# Altium PCB HelicopterControllerPCB.PcbDoc
Units mil, origin at the board's own origin, x right, y up, seen from the top; angles counter-clockwise.
Board outline 2834.65 x 2440.95 mil, 2 copper layers (Top Layer, Bottom Layer); 28 components, 32 nets, 156 pads, 7 vias.
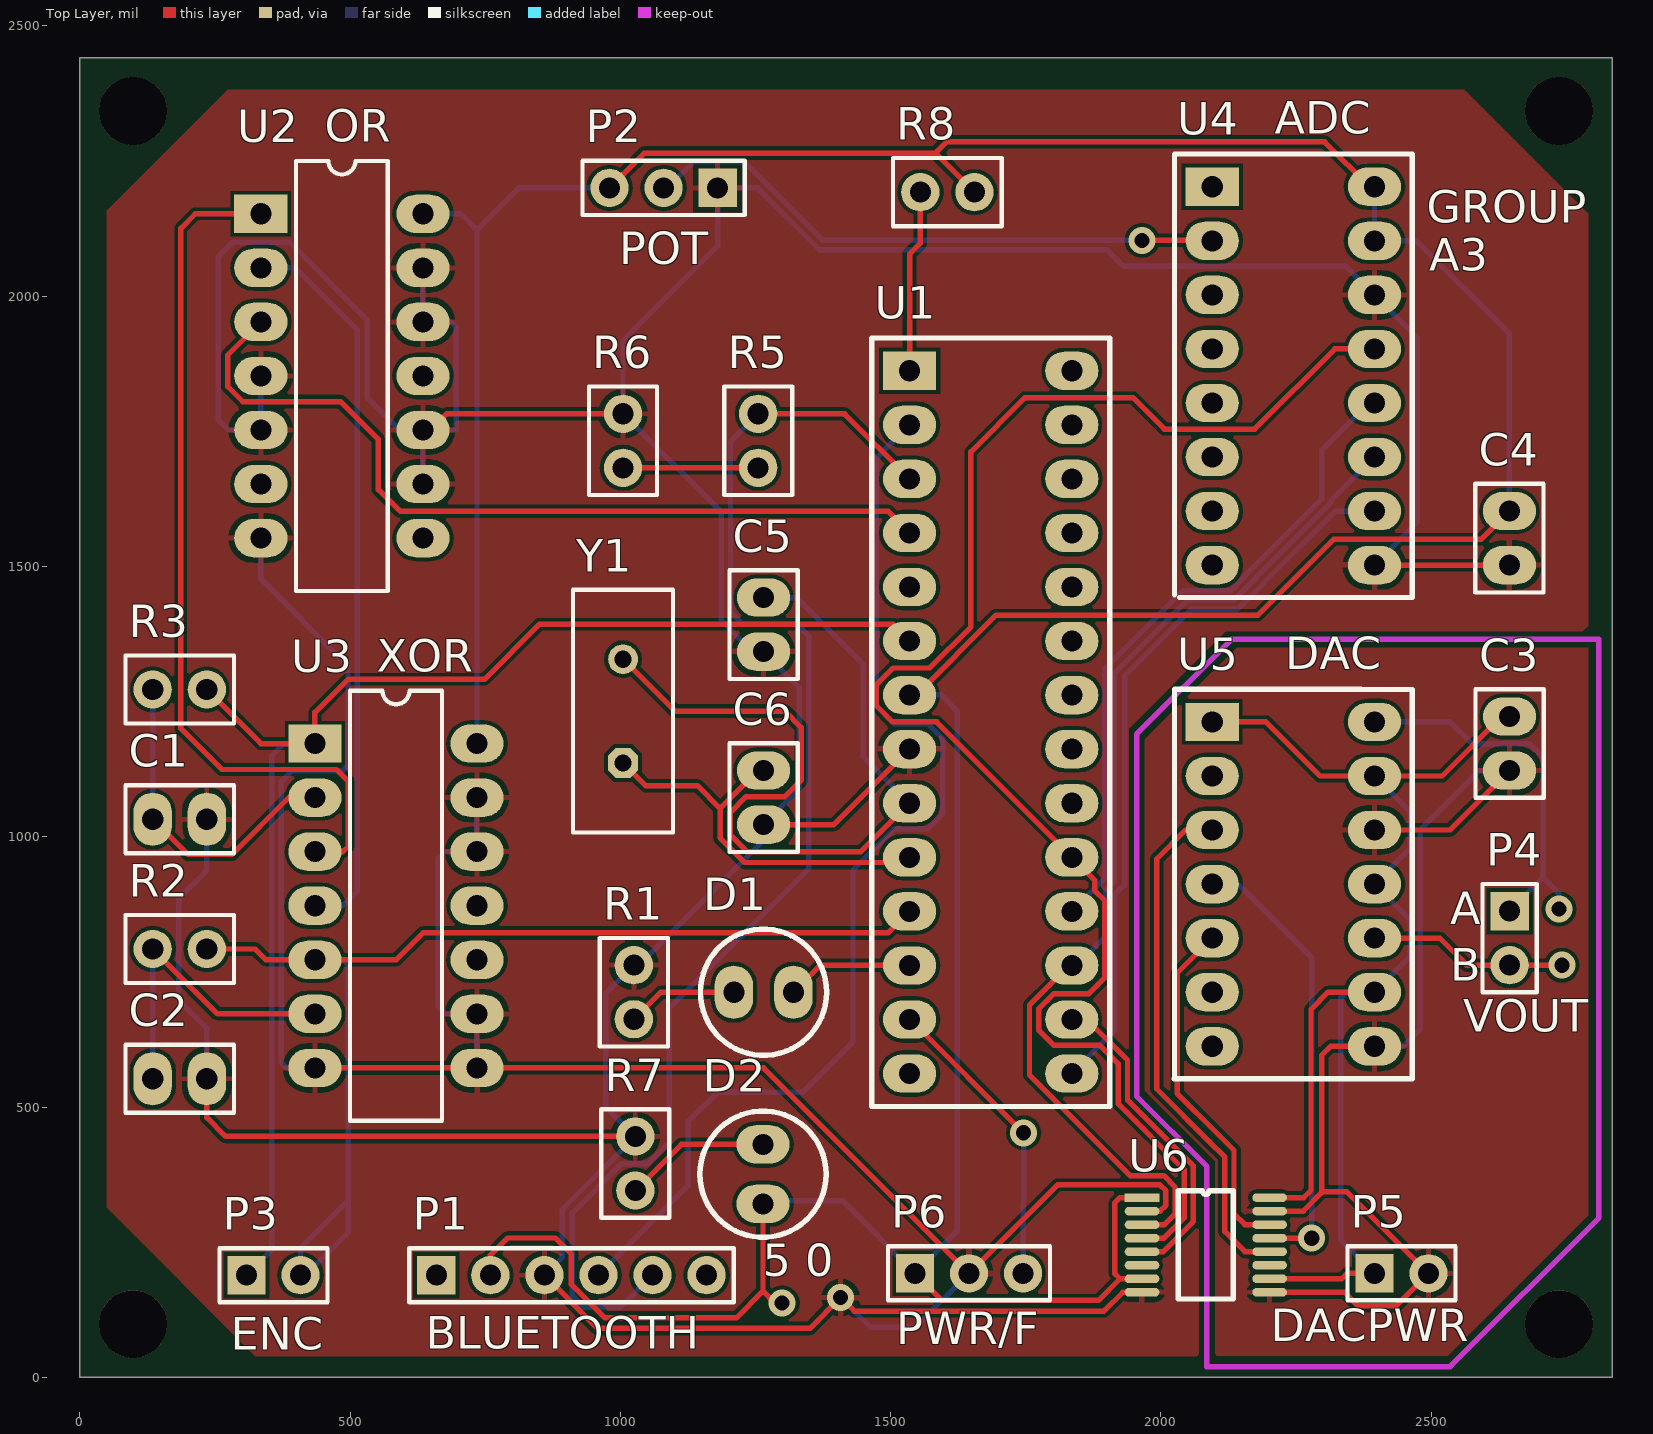
[diagram p0: Top Layer view]
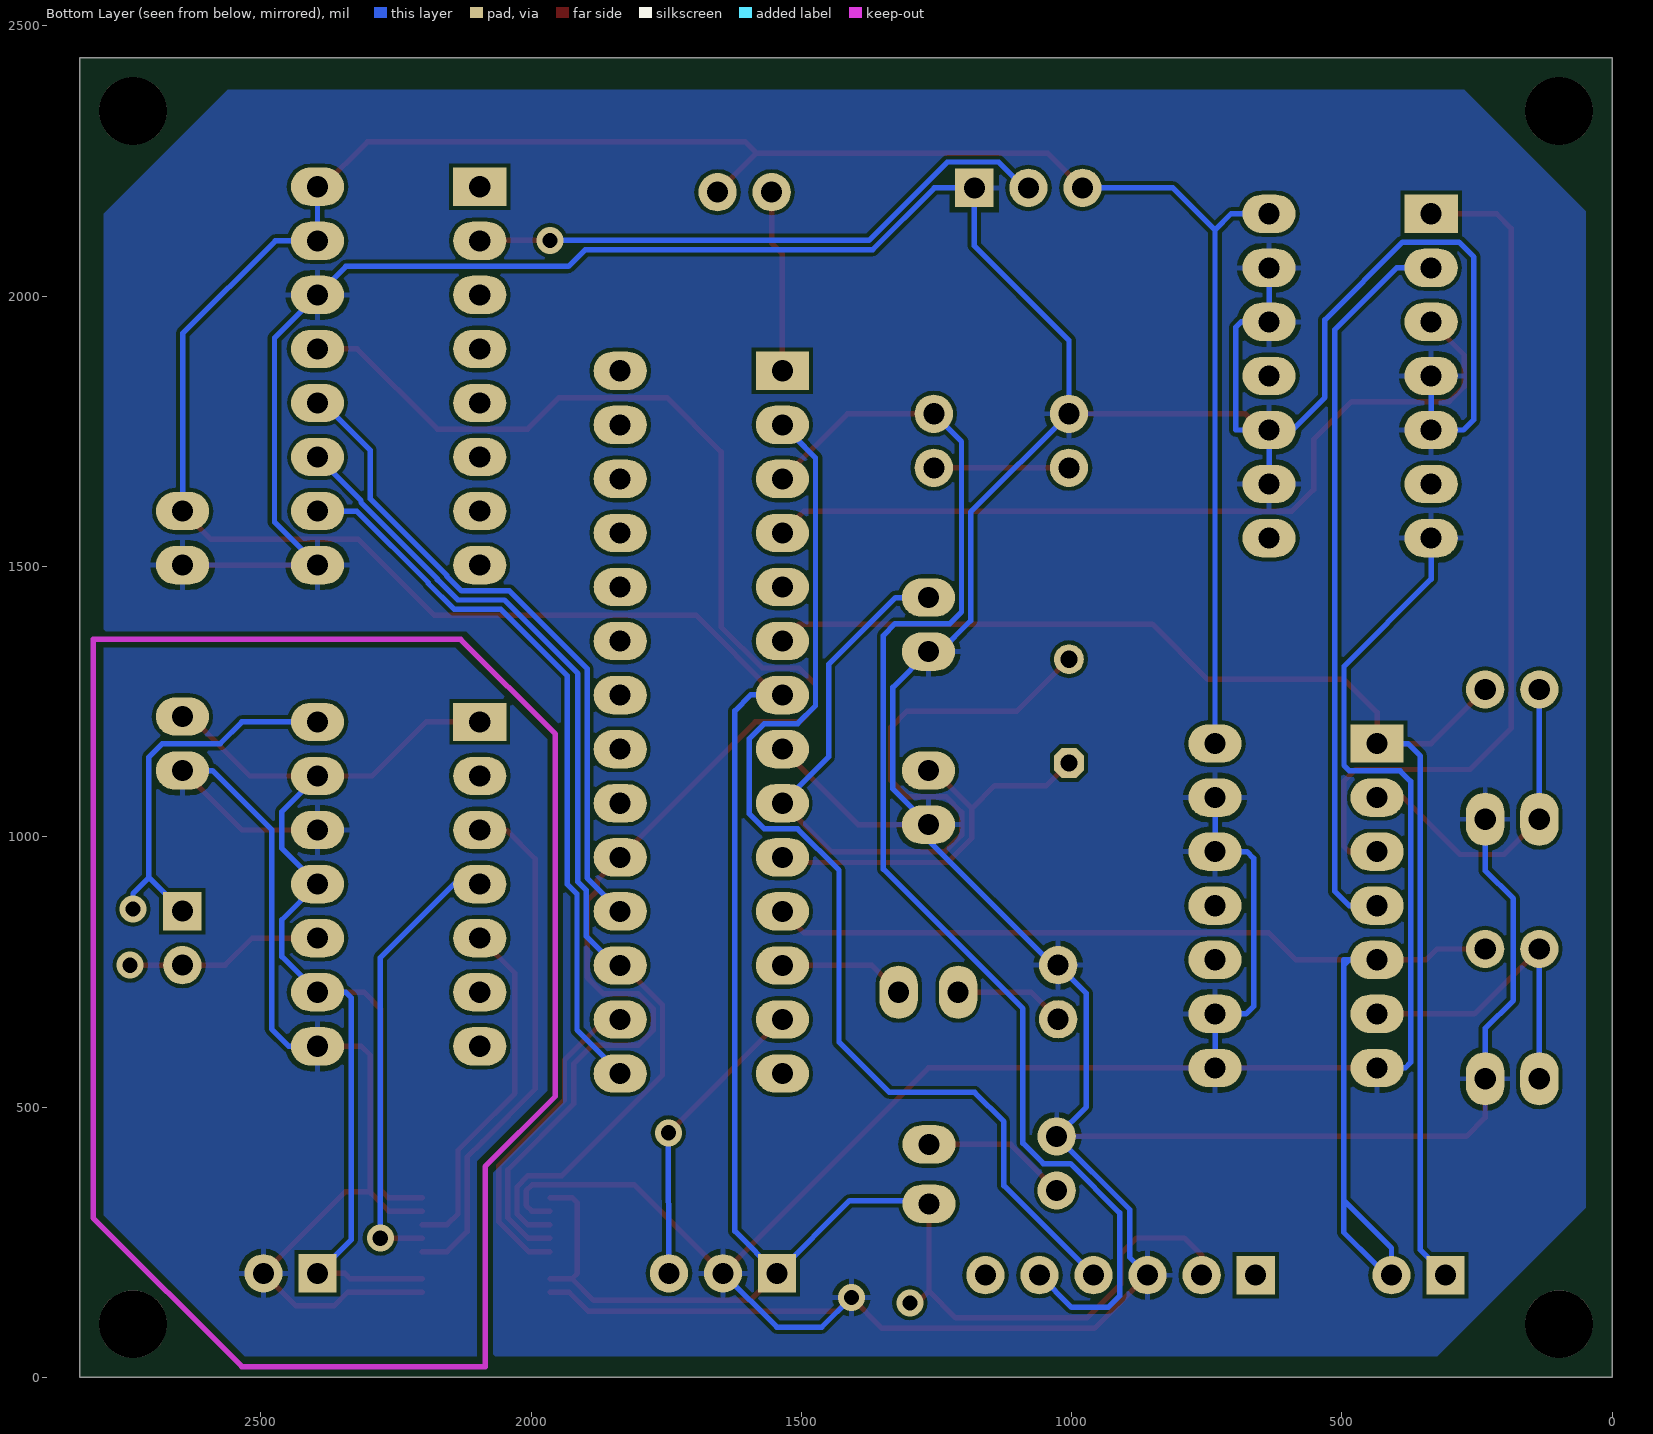
[diagram p1: Bottom Layer view, seen from below]

## Layer stack, top to bottom
Top Solder: solder mask 0.4, Solder Resist, Dk 3.5
Top Layer: signal copper 1.4
Dielectric1: dielectric 12.6, FR-4, Dk 4.8
Bottom Layer: signal copper 1.4
Bottom Solder: solder mask 0.4, Solder Resist, Dk 3.5

## Board outline
0,0 0,2440.94 2834.65,2440.95 2834.65,0

## Design rules (kind name [scope] priority, off if disabled: settings)
Clearance [All] p1: gap=7
ComponentClearance [All] p1: gap=7 collisioncheckmode=3 verticalgap=10 showdistances=FALSE
FabricationTestPointUsage TestPointUsage [All] p2: valid=0 allowmultiple=FALSE
FabricationTestpoint Testpoint [All] p2: side=3 testpointundercomponent=TRUE minsize=40 maxsize=100 preferedsize=60 minholesize=0 maxholesize=40 preferedholesize=32 testpointgrid=1 allowsidetop=TRUE allowsidebottom=TRUE usegrid=TRUE gridtolerance=0.01
HoleSize HoleSize20 [HoleSize = 20 AND NOT(PadIsPlated)] p1: absolutevalues=TRUE maxlimit=20 minlimit=20 maxpercent=80.000 minpercent=20.000
HoleSize HoleSize20_p [HoleSize = 17 AND PadIsPlated] p2: absolutevalues=TRUE maxlimit=17 minlimit=17 maxpercent=80.000 minpercent=20.000
HoleSize HoleSize28 [HoleSize = 28 AND NOT(PadIsPlated)] p3: absolutevalues=TRUE maxlimit=28 minlimit=28 maxpercent=80.000 minpercent=20.000
HoleSize HoleSize28_p [HoleSize = 25 AND PadIsPlated] p4: absolutevalues=TRUE maxlimit=25 minlimit=25 maxpercent=80.000 minpercent=20.000
HoleSize HoleSize35 [HoleSize = 35 AND NOT(PadIsPlated)] p5: absolutevalues=TRUE maxlimit=35 minlimit=35 maxpercent=80.000 minpercent=20.000
HoleSize HoleSize35_p [HoleSize = 32 AND PadIsPlated] p6: absolutevalues=TRUE maxlimit=32 minlimit=32 maxpercent=80.000 minpercent=20.000
HoleSize HoleSize38 [HoleSize = 38 AND NOT(PadIsPlated)] p7: absolutevalues=TRUE maxlimit=38 minlimit=38 maxpercent=80.000 minpercent=20.000
HoleSize HoleSize38_p [HoleSize = 35 AND PadIsPlated] p8: absolutevalues=TRUE maxlimit=35 minlimit=35 maxpercent=80.000 minpercent=20.000
HoleSize HoleSize42 [HoleSize = 42 AND NOT(PadIsPlated)] p9: absolutevalues=TRUE maxlimit=42 minlimit=42 maxpercent=80.000 minpercent=20.000
HoleSize HoleSize42_p [HoleSize = 39 AND PadIsPlated] p10: absolutevalues=TRUE maxlimit=39 minlimit=39 maxpercent=80.000 minpercent=20.000
HoleSize HoleSize52 [HoleSize = 52 AND NOT(PadIsPlated)] p11: absolutevalues=TRUE maxlimit=52 minlimit=52 maxpercent=80.000 minpercent=20.000
HoleSize HoleSize52_p [HoleSize = 49 AND PadIsPlated] p12: absolutevalues=TRUE maxlimit=49 minlimit=49 maxpercent=80.000 minpercent=20.000
HoleSize HoleSize60 [HoleSize = 60 AND NOT(PadIsPlated)] p13: absolutevalues=TRUE maxlimit=60 minlimit=60 maxpercent=80.000 minpercent=20.000
HoleSize HoleSize60_p [HoleSize = 57 AND PadIsPlated] p14: absolutevalues=TRUE maxlimit=57 minlimit=57 maxpercent=80.000 minpercent=20.000
HoleSize HoleSize86 [HoleSize = 86 AND NOT(PadIsPlated)] p15: absolutevalues=TRUE maxlimit=86 minlimit=86 maxpercent=80.000 minpercent=20.000
HoleSize HoleSize86_p [HoleSize = 83 AND PadIsPlated] p16: absolutevalues=TRUE maxlimit=83 minlimit=83 maxpercent=80.000 minpercent=20.000
HoleSize HoleSize125 [HoleSize = 125 AND NOT(PadIsPlated)] p17: absolutevalues=TRUE maxlimit=125 minlimit=125 maxpercent=80.000 minpercent=20.000
HoleSize HoleSize125_p [HoleSize = 122 AND PadIsPlated] p18: absolutevalues=TRUE maxlimit=122 minlimit=122 maxpercent=80.000 minpercent=20.000
HoleSize HoleSize152 [HoleSize = 152 AND NOT(PadIsPlated)] p19: absolutevalues=TRUE maxlimit=152 minlimit=152 maxpercent=80.000 minpercent=20.000
HoleSize HoleSize152_p [HoleSize = 149 AND PadIsPlated] p20: absolutevalues=TRUE maxlimit=149 minlimit=149 maxpercent=80.000 minpercent=20.000
HoleSize HoleSizeNULL [HoleSize <> ((20 OR 28 OR 35 OR 38 OR 42 OR 52 OR 60 OR 86 OR 125 OR 152) AND NOT(PadIsPlated))] p21: absolutevalues=TRUE maxlimit=0 minlimit=0 maxpercent=80.000 minpercent=20.000
HoleSize HoleSizeNULL_p [HoleSize <> ((17 OR 25 OR 32 OR 35 OR 39 OR 49 OR 57 OR 83 OR 122 OR 149) AND PadIsPlated)] p22: absolutevalues=TRUE maxlimit=0 minlimit=0 maxpercent=80.000 minpercent=20.000
HoleSize [All] p23: absolutevalues=TRUE maxlimit=100 minlimit=1 maxpercent=80.000 minpercent=20.000
MinimumAnnularRing [All] p1: minimumring=8
PolygonConnect [All] p1: connectstyle=Relief reliefconductorwidth=10 reliefentries=4 polygonreliefangle="90 Angle" airgapwidth=10
RoutingVias [All] p1: holewidth=28 width=50 viastyle="Through Hole" minholewidth=28 minwidth=50 maxholewidth=28 maxwidth=50
SilkToSilkClearance [All] p1: silktosilkclearance=0
SilkToSolderMaskClearance SilkscreenOverComponentPads [IsPad] p2: minsilkscreentomaskgap=10 clearancetoexposedcopper=TRUE
SolderMaskExpansion [All] p1: expansion=4
UnpouredPolygon [All] p1: allowunpoured=FALSE
Width [All] p1: maxlimit=200 minlimit=7 preferedwidth=10
26 further rules are at their usual default settings.

## Classes and differential pairs
component class "U_Quadrature Decoder": C1 C2 R2 R3 U2 U3
component class U_DAC: C3 C4 P5 U5 U6
component class U_BluetoothModule: P1 R5 R6
component class U_ADC: U4
component class Top: C5 C6 D1 D2 P2 P3 P4 P6 R1 R7 R8 U1 Y1

## Components (designator, comment, footprint, x,y, rotation, side; value= is the part's Value field where it differs from the comment)
C1 "G-Cap" Cap2.54mm_LGE1.0 184.88,1032.44 r180 top
C2 "G-Cap" Cap2.54mm_LGE1.0 184.88,552.44 r180 top
C3 "G-Cap" Cap2.54mm_LGE1.0 2644.88,1172.44 r270 top
C4 "G-Cap" Cap2.54mm_LGE1.0 2644.41,1552.44 r270 top
C5 "G-Cap" Cap2.54mm_LGE1.0 1264.88,1392.44 r90 top
C6 "G-Cap" Cap2.54mm_LGE1.0 1264.88,1072.44 r90 top
D1 "G-LED" LED_LGE1.0 1264.88,712.44 r180 top
D2 "G-LED" LED_LGE1.0 1263.78,375.98 r90 top
P1 "JY-MCU Header" HDR1X6_LGE1.0 909.45,188.98 r0 top
P2 "POTENTIOMETER" HDR1X3_LGE1.0 1079.84,2200.31 r180 top
P3 "ENCODER" HDR1X2_LGE1.0 358.27,188.98 r0 top
P4 "MOTOR-CONTROL-HEADER" HDR1X2_LGE1.0 2644.88,812.44 r270 top
P5 "MOTOR-DIGITAL-POWER" HDR1X2_LGE1.0 2444.88,192.44 r0 top
P6 "ARDUINO-POWER-HEADER" HDR1X3_LGE1.0 1644.88,192.44 r0 top
R1 "G-Res" Res2.54mm_LGE1.0 1024.88,712.44 r90 top
R2 "G-Res" Res2.54mm_LGE1.0 184.88,792.44 r180 top
R3 "G-Res" Res2.54mm_LGE1.0 184.88,1272.44 r180 top
R5 "G-Res" Res2.54mm_LGE1.0 1254.88,1732.44 r90 top
R6 "G-Res" Res2.54mm_LGE1.0 1004.88,1732.44 r270 top
R7 "G-Res" Res2.54mm_LGE1.0 1027.56,395.67 r90 top
R8 "G-Res" Res2.54mm_LGE1.0 1604.88,2192.44 r0 top
U1 "ATmega328P-PU" ISDIP16_LGE1.0#1 1685,1212 r270 top
U2 "D-Or" DIP14_LGE1.0 484.88,1852.44 r270 top
U3 "D-XOR" DIP14_LGE1.0 584.88,872.44 r270 top
U4 "MCP3008 ADC" ISDIP16_LGE1.0#2 2244.88,1852.44 r270 top
U5 "MCP4912 DAC" ISDIP14_LGE1.0 2244.88,912.44 r270 top
U6 "ADUM7441 SMT16" ADUM7441 1964.88,332.44 r0 top
Y1 "ECS-160-20" HC-49U 1004.88,1232.44 r90 top

## Footprints (in the part's own frame and the unit in brackets; to place one, negate y for a bottom-side part, rotate by r counter-clockwise, add the part's x,y. Pads: shape width x height; smd on the part's side, far side on the other; paste and mask are expansions set on the pad)
ADUM7441 [mil]
  rect 64x16 smd: 1(0,0)
  oval 64x16 smd: 2(0,-25) 3(0,-50) 4(0,-75) 5(0,-100) 6(0,-125) 7(0,-150) 8(0,-175) 9(236,-175) 10(236,-150) 11(236,-125) 12(236,-100) 13(236,-75) 14(236,-50) 15(236,-25) 16(236,0)
  silkscreen extent 67,-188 169,12
Cap2.54mm_LGE1.0 [mm] "Capacitor, Ceramic, Thru-Hole, Dipped Radial; Body 5.1 x 3.2 mm (WxT) Pin Spacing 2.54 mm (typ)"
  oval 1.8x2.5 hole 0.991: 1(-1.27,0) 2(1.27,0)
  silkscreen extent -2.55,-1.6 2.55,1.6
DIP14_LGE1.0 [mm] "DIP; 14 Leads; Row Spacing 7.62 mm; Pitch 2.54 mm"
  rect 1.8x2.5 hole 0.991: 1(-7.62,-3.81)
  oval 1.8x2.5 hole 0.991: 2(-5.08,-3.81) 3(-2.54,-3.81) 4(0,-3.81) 5(2.54,-3.81) 6(5.08,-3.81) 7(7.62,-3.81) 8(7.62,3.81) 9(5.08,3.81) 10(2.54,3.81) 11(0,3.81) 12(-2.54,3.81) 13(-5.08,3.81) 14(-7.62,3.81)
  silkscreen extent -10.1,-2.16 10.1,2.16
HC-49U [mm] "Quartz Crystal, Thru-Hole; 2 Leads; Body 11.35 x 4.65 x 13.46 mm (LxWxH max)"
  oct 1.4x1.4 hole 0.813: 1(-2.44,0)
  round 1.4 hole 0.813: 2(2.44,0)
  silkscreen extent -5.7,-2.35 5.7,2.35
HDR1X2_LGE1.0 [mm] "Connector; Header; 2 Position"
  rect 1.8x1.8 hole 0.991: 1(-1.27,0)
  round 1.8 hole 0.991: 2(1.27,0)
  silkscreen extent -2.54,-1.27 2.54,1.27
HDR1X3_LGE1.0 [mm] "Connector; Header; 4 Position"
  rect 1.8x1.8 hole 0.991: 1(-2.54,0)
  round 1.8 hole 0.991: 2(0,0) 3(2.54,0)
  silkscreen extent -3.81,-1.27 3.81,1.27
HDR1X6_LGE1.0 [mil] "Connector; Header; 6 Position"
  rect 70.87x70.87 hole 39: 1(-250,0)
  round 70.87 hole 39: 2(-150,0) 3(-50,0) 4(50,0) 5(150,0) 6(250,0)
  silkscreen extent -300,-50 300,50
ISDIP14_LGE1.0 [mm] "DIP; 14 Rectangular Pins; Row Space 7.62 mm; Pitch 2.54 mm"
  rect 1.8x2.5 hole 0.991: 1(-7.62,-3.81)
  oval 1.8x2.5 hole 0.991: 2(-5.08,-3.81) 3(-2.54,-3.81) 4(0,-3.81) 5(2.54,-3.81) 6(5.08,-3.81) 7(7.62,-3.81) 8(7.62,3.81) 9(5.08,3.81) 10(2.54,3.81) 11(0,3.81) 12(-2.54,3.81) 13(-5.08,3.81) 14(-7.62,3.81)
  silkscreen extent -9.16,-5.59 9.14,5.59
ISDIP16_LGE1.0#1 [mm] "DIP; 16 Rectangular Pins; Row Space 7.62 mm; Pitch 2.54 mm"
  rect 1.8x2.5 hole 0.991: 1(-16.51,-3.81)
  oval 1.8x2.5 hole 0.991: 2(-13.97,-3.81) 3(-11.43,-3.81) 4(-8.89,-3.81) 5(-6.35,-3.81) 6(-3.81,-3.81) 7(-1.27,-3.81) 8(1.27,-3.81) 9(3.81,-3.81) 10(6.35,-3.81) 11(8.89,-3.81) 12(11.43,-3.81) 13(13.97,-3.81) 14(16.51,-3.81) 15(16.51,3.81) 16(13.97,3.81) 17(11.43,3.81) 18(8.89,3.81) 19(6.35,3.81) 20(3.81,3.81) 21(1.27,3.81) 22(-1.27,3.81) 23(-3.81,3.81) 24(-6.35,3.81) 25(-8.89,3.81) 26(-11.43,3.81) 27(-13.97,3.81) 28(-16.51,3.81)
  silkscreen extent -18.05,-5.59 18.06,5.59
ISDIP16_LGE1.0#2 [mm] "DIP; 16 Rectangular Pins; Row Space 7.62 mm; Pitch 2.54 mm"
  rect 1.8x2.5 hole 0.991: 1(-8.89,-3.81)
  oval 1.8x2.5 hole 0.991: 2(-6.35,-3.81) 3(-3.81,-3.81) 4(-1.27,-3.81) 5(1.27,-3.81) 6(3.81,-3.81) 7(6.35,-3.81) 8(8.89,-3.81) 9(8.89,3.81) 10(6.35,3.81) 11(3.81,3.81) 12(1.27,3.81) 13(-1.27,3.81) 14(-3.81,3.81) 15(-6.35,3.81) 16(-8.89,3.81)
  silkscreen extent -10.43,-5.59 10.41,5.59
LED_LGE1.0 [mil] "2.8 mm (typ)"
  oval 70.87x98.43 hole 39: 1(-55,0) 2(55,0)
  silkscreen extent -117,-117 117,117
Res2.54mm_LGE1.0 [mil] "Resistor,Thru-Hole, Dipped Radial; Body 5.1 x 3.2 mm (WxT) Pin Spacing 2.54 mm (typ)"
  round 70.87 hole 39: 1(-50,0) 2(50,0)
  silkscreen extent -100,-63 100,63

## Part data
C1 C2 C3 C4 C5 C6: "capacitor (specify value)"
D1 D2: "Typical RED, GREEN, YELLOW, AMBER GaAs LED"
P1: library part C-Hdr1x6, "Header, 6-Pin"
P2 P6: library part C-Hdr1x3, "Header, 4-Pin"
P3 P4 P5: library part C-Hdr1x2, "Header, 2-Pin"
R1 R2 R3 R5 R6 R7 R8: "resistor (specify value)"
U1: "8-bit AVR Microcontroller, 32KB Flash, 1KB EEPROM, 2KB SRAM, 28-pin PDIP, Industrial Grade (-40°C to 85°C)"
U2: "quad 2-input OR gate"
U3: "CD4070B"
U4: library part G-DIP16, "16-pin DIP socket"
U5: library part G-DIP14, "DAC"
U6: library part ADUM7441CRQZ, "Quad Channel Digital Isolator, 1 KV rms Insulation Rating, 25 Mbps Data Rate, 50 ns Delay, Industrial, 16-pin SOP (RQ-16), Tube"
Y1: library part ECS-200-20-1, "Crystal Oscillator"

## Free pads (board coordinates)
  round 125 hole 125 unplated: MNT(98.43,98.43) MNT(98.43,2342.52) MNT(2736.22,98.43) MNT(2736.22,2342.52)

## Via types
v1: diameter 50, hole 28, Top Layer to Bottom Layer, 7 vias

## Nets (pads, with @x,y where several pads share a name; then routed paths per layer and width w, separated by ;. In a path a pad name is that pad's centre, name@x,y a point inside that pad or via, vN(x,y) a via of type N, cw(c..) or ccw(c..) an arc to the next point about the centre after c; other vN are vias at no path point)
ADC-SS: U1.15 U4.10 | length 1365
  Bottom Layer w10: U1.15@1834.88,562.44 1915,642.56 1915,894.48 1933,912.48 1933,1298 2056.01,1421.01 2142.39,1421.01 2190.09,1468.71 2190.09,1470.09 2322.44,1602.44 U4.10
DAC-SS: U1.16 U6.5 | length 601.9
  Top Layer w10: U1.16@1834.88,662.44 1862.6,662.44 1938,587.04 1938,512.96 2059.88,391.08 2059.88,287.91 2004.41,232.44 U6.5
ENCODER-CHA: P3.1 R3.1 U1.6 U3.1 | length 2548.7
  Top Layer w10: R3.1 334.88,1172.44 U3.1 434.88,1230.16 496.06,1291.34 748.44,1291.34 850.28,1393.18 1504.14,1393.18 U1.6@1534.88,1362.44
  Bottom Layer w10: P3.1 354.88,235.59 354.88,1149.4 377.93,1172.44 U3.1
ENCODER-CHB: P3.2 R2.1 U1.11 U3.5 | length 2618.6
  Top Layer w10: R2.1 324.28,792.44 344.28,772.44 U3.5 585.28,772.44 635.02,822.18 1494.62,822.18 U1.11@1534.88,862.44
  Bottom Layer w10: P3.2 408.27,239 496.4,327.13 496.4,762.85 ; U3.5 486.81,772.44 ; 437.83,209.49 496.81,268.46 496.81,762.44 496.4,762.85 ; 486.81,772.44 496.4,762.85 ; 486.81,772.44 496.4,772.44 496.4,762.85
ENCODER-INT: U1.4 U2.3 | length 1572.6
  Top Layer w10: U2.3 273.67,1891.23 273.67,1832.79 301.45,1805.01 482.31,1805.01 552.28,1735.04 552.28,1642.18 592.28,1602.18 1495.14,1602.18 U1.4@1534.88,1562.44
FREQUENCY: P6.3 U1.13 | length 557
  Top Layer w10: U1.13@1535.88,662.44 v1(1745.88,452.44)
  Bottom Layer w10: P6.3 v1(1745.88,452.44)
HEARTBEAT: D1.1 U1.12 | length 235.7
  Top Layer w10: D1.1 1369.88,762.44 U1.12@1534.88,762.44
MISO: U1.18 U4.12 | length 1230
  Bottom Layer w10: U1.18@1834.88,862.44 1896.21,923.77 1896.21,1042.14 1896.21,1081.65 1896.21,1281.65 1896,1281.86 1896,1311 2040.01,1455.01 2128.31,1455.01 2156.09,1482.79 2156.09,1484.18 2297.41,1625.49 2297.41,1715.44 2384.41,1802.44 U4.12
MOSI: U1.17 U4.11 U6.3 | length 1940.6
  Top Layer w10: U1.17 1830.1,762 1756.79,688.69 1756.79,559.35 1942.96,373.18 2005.15,373.18 2025.88,352.45 2025.88,302 2006.33,282.44 U6.3
  Bottom Layer w10: U1.17@1834.88,762.44 1844.41,762.44 1898,816.03 1898,901.52 1913.21,916.73 1913.21,1301.83 1913,1302.04 2048.97,1438.01 2135.35,1438.01 2173.09,1475.75 2173.09,1477.14 2314.41,1618.45 2314.41,1621.97 U4.11
NetC1_2: C1.2 R3.2 U3.2 | length 610.6
  Top Layer w10: C1.2 200.14,967.18 281.28,967.18 386.54,1072.44 U3.2
  Bottom Layer w10: C1.2 R3.2
NetC2_2: C2.2 R2.2 U3.6 | length 589.7
  Top Layer w10: R2.2 254.88,672.44 U3.6
  Bottom Layer w10: C2.2 R2.2
NetC5_2: C5.2 U1.9 Y1.2 | length 1586.7
  Top Layer w10: Y1.2 1100.95,1232.44 1304.41,1232.44 1334.41,1202.44 1334.41,1104.18 1304.41,1074.18 1232.28,1074.18 1203.28,1045.18 1203.28,1003.18 1234.02,972.44 1444.88,972.44 U1.9@1534.88,1062.44
  Bottom Layer w10: C5.2 1325.81,1442.44 1449,1319.25 1449,1148.32 U1.9@1534.88,1062.44
NetC6_2: C6.2 U1.10 Y1.1 | length 751.7
  Top Layer w10: Y1.1 1046.77,1094.49 1142.36,1094.49 1184.41,1052.44 ; C6.2 1254.41,1122.44 1184.41,1052.44 ; U1.10@1534.88,962.44 1524.88,952.44 1229.98,952.44 1184.41,998.01 1184.41,1052.44
NetD1_2: D1.2 R1.1 | length 205.7
  Top Layer w10: R1.1 1074.88,712.44 D1.2
NetD2_2: D2.2 R7.1 | length 271.6
  Top Layer w10: R7.1 1112.87,430.98 D2.2
NetR5_1: R5.1 R6.2 | length 250
  Top Layer w10: R6.2 R5.1
NetU2_1: U2.1 U3.3 | length 1620.9
  Top Layer w10: U2.1 213.81,2152.44 186.81,2125.44 186.81,1200.44 262.81,1124.44 474.81,1124.44 496.81,1102.44 496.81,982.44 486.81,972.44 U3.3
NetU2_2: U2.2 U3.4 | length 1354.1
  Bottom Layer w10: U2.2 398.81,2052.44 513.1,1938.16 513.1,898.72 486.81,872.44 U3.4
NetU5_3: U5.3 U6.12 | length 964.8
  Top Layer w10: U5.3 2045.54,1012.44 1992.13,959.02 1992.13,533.46 2090,435.59 2118,407.59 2118,269.44 2155,232.44 U6.12
NetU5_4: U5.4 U6.13 | length 837.2
  Top Layer w10: U6.13 v1(2278.81,257.44)
  Bottom Layer w10: U5.4 2142.81,912.44 2278.81,776.44 v1(2278.81,257.44)
NetU5_5: U5.5 U6.14 | length 654.5
  Top Layer w10: U5.5 2030,747.56 2030,525.12 2105,450.12 2135,420.12 2135,302.44 2155,282.44 U6.14
P5V: C4.1 D2.1 P1.2 P2.3 P6.1 R8.2 U1.7 U2.14 U3.14 U4.15 U4.16 U6.1 U6.7 | length 8019.8
  Top Layer w10: P1.2 759.45,225.98 791.34,257.87 879.92,257.87 909.45,228.35 909.45,171.89 971.11,110.24 1214.57,110.24 1263.78,159.45 ; P2.3 1044.28,2264.75 1582.57,2264.75 ; D2.1 1263.78,159.45 ; v1(1299.21,137.8) 1285.43,137.8 1263.78,159.45 ; U1.7@1534.88,1262.44 1547.44,1262.44 1695,1410 2179.1,1410 2319.28,1550.18 2592.15,1550.18 C4.1 ; P6.1 1594.88,142.44 1884.41,142.44 1924.41,182.44 ; R8.2 1582.57,2264.75 ; U6.7 1924.41,182.44 ; U6.1 1924.41,332.44 1914.41,322.44 1914.41,192.44 1924.41,182.44 ; U4.16 2385.67,2202.44 2302.68,2285.43 1603.26,2285.43 1582.57,2264.75
  Bottom Layer w10: U2.14 704.81,2152.44 734.81,2122.44 ; U3.14 734.81,1172.44 734.81,2122.44 ; P2.3 812.69,2200.31 734.81,2122.44 ; U1.7@1534.88,1262.44 1593.56,1262.44 1623,1233 1623,270.56 P6.1 1410.55,326.77 D2.1@1294.21,326.77 ; U4.16 U4.15 2473.02,2102.44 2644.41,1931.05 C4.1 ; D2.1@1276.1,308.66 D2.1@1294.21,326.77 ; D2.1@1276.1,308.66 1264.88,297.44 D2.1@1276.1,308.66 ; D2.1@1276.1,308.66 D2.1@1294.21,326.77
P5V-MOTOR: C3.1 P5.1 U5.1 U5.9 U5.11 U5.13 U6.10 U6.16 | length 2493.9
  Top Layer w10: U5.1 2194.28,1212.44 2294.28,1112.44 U5.13 2520.28,1112.44 2630.28,1222.44 C3.1 ; U6.10 2334.41,182.44 2344.41,192.44 P5.1 ; U6.16 2264.09,332.44 2277.56,345.91 2277.56,680.91 2309.09,712.44 U5.9
  Bottom Layer w10: P5.1 2332.81,254.51 2332.81,702.44 2342.81,712.44 U5.9 2460.81,778.37 2460.81,846.51 U5.11 2460.81,978.37 2460.81,1046.51 U5.13
P5VGND: C1.1 C2.1 C4.2 C5.1 C6.1 P1.3 P2.1 P6.2 R1.2 R6.1 R7.2 U1.8 U2.4 U2.5 U2.7 U2.9 U2.10 U2.12 U2.13 U3.7 U3.8 U3.9 U3.12 U3.13 U4.9 U4.14 U6.2 U6.8 | length 13540.7
  Top Layer w10: C2.1 234.88,480.58 269.8,445.67 R7.2 ; U3.7 U3.8 1264.88,572.44 P6.2 1808.62,356.18 1998.11,356.18 2008.88,345.41 2008.88,318.04 1998.28,307.44 U6.2 ; U2.10 648.4,1752.44 678.4,1782.44 R6.1 ; P1.3 957.87,90.55 1350.39,90.55 v1(1407.48,147.64) 1432.68,122.44 1445.2,122.44 1894.41,122.44 1929.41,157.44 U6.8 ; C6.1 1394.88,1022.44 U1.8@1534.88,1162.44 ; U4.9 C4.2
  Bottom Layer w10: C2.1 234.88,645.44 182.81,697.51 182.81,885.44 234.88,937.51 C1.1 ; U2.7 334.81,1552.44 334.81,1476.44 496.1,1315.16 496.1,1132.04 486.11,1122.05 392.42,1122.05 372.81,1102.44 372.81,582.44 382.81,572.44 U3.7 ; U2.5 U2.5@334.4,1752.44 ; U2.4 334.4,1852.44 U2.5@334.4,1752.44 ; U2.9 634.4,1652.44 U2.10@634.4,1752.44 ; U2.13 634.4,2052.44 634.4,1952.44 U2.12 686.4,1952.44 696.4,1942.44 696.4,1752.44 U2.10 U2.10@634.4,1752.44 ; U3.8 734.4,572.44 U3.9@734.4,672.44 ; U3.9 U3.9@734.4,672.44 ; U3.12 U3.12@734.4,972.44 ; U3.13 734.4,1072.44 U3.12@734.4,972.44 ; P1.3 892.45,221.98 892.45,310.56 R7.2 972.81,500.42 972.81,710.37 R1.2 1034.41,762.44 1264.88,992.91 C6.1 1330.81,1088.37 1330.81,1276.51 C5.1 1243.83,1342.44 1186.67,1399.61 1186.67,1600.65 R6.1 1004.88,1918.27 1179.84,2093.23 P2.1 1253.75,2200.31 1367.84,2086.23 1899.56,2086.23 1930.78,2055.01 2342.32,2055.01 U4.14 2474.41,1922.91 2474.41,1581.97 U4.9 ; v1(1407.48,147.64) 1462.2,92.92 1545.36,92.92 P6.2 ; U2.5@334.4,1752.44 275.12,1752.44 255.91,1771.65 255.91,2072.5 283.4,2100 387.78,2100 531.5,1956.28 531.5,1812.56 591.62,1752.44 U2.10@634.4,1752.44 ; U3.9@734.4,672.44 677.4,672.44 663.4,686.44 663.4,960 675.84,972.44 U3.12@734.4,972.44
P5VGND-MOTOR: C3.2 P5.2 U5.8 U5.12 U6.9 U6.15 | length 2031.4
  Top Layer w10: U6.9 2339.41,157.44 2364.41,132.44 2434.88,132.44 P5.2 2344.13,343.19 2297.24,343.19 ; U6.15 2263.14,307.44 2297.24,341.55 2297.24,343.19 ; U5.8 2313.81,612.44 2297.24,595.87 2297.24,343.19 ; U5.12 2534.88,1012.44 C3.2
  Bottom Layer w10: U5.8 2447.81,612.44 2479.88,644.51 2479.88,1013.23 2589.1,1122.44 C3.2
POT-IN: P2.2 U4.2 | length 1095.3
  Top Layer w10: v1(1964.88,2103.23) 2094.09,2103.23 U4.2
  Bottom Layer w10: P2.2 1086.97,2200.31 1134.88,2248.23 1229.88,2248.23 1374.88,2103.23 v1(1964.88,2103.23)
RESET: R8.1 U1.1 | length 338.3
  Top Layer w10: U1.1@1534.88,1862.44 1534.88,2078.23 1554.88,2098.23 R8.1
RXD: P1.4 U1.2 | length 2136.5
  Bottom Layer w10: P1.4 1125.28,354.81 1125.28,473.23 1179.28,527.23 1337.28,527.23 1430.28,620.23 1430.28,938.14 1506.71,1014.57 1568.43,1014.57 1596.21,1042.35 1596.21,1181.65 1568.43,1209.43 1506.71,1209.43 1473.79,1242.35 1473.79,1700.79 U1.2 ; 1493.28,1720.84 U1.2@1534.88,1762.44
SCK: U1.19 U4.13 U6.4 | length 2968.4
  Top Layer w10: U6.4 2005.37,257.44 2042.88,294.95 2042.88,384.04 1921,505.92 1921,580 1886.43,614.57 1801.57,614.57 1773.79,642.35 1773.79,681.65 1801.57,709.43 1866,709.43 1896.21,739.65 1896.21,881.65 1877.28,900.58 1877.28,920.04 1584.88,1212.44 1503.7,1212.44 1473.79,1242.35 1473.79,1281.65 1504.32,1312.18 1572.18,1312.18 1648.28,1388.28 1648.28,1712.18 1748.28,1812.18 1948.28,1812.18 2006.28,1754.18 2173.28,1754.18 2321.54,1902.44 U4.13
TXD: P1.5 R5.2 U1.3 | length 2493.6
  Top Layer w10: R5.2 1414.88,1782.44 U1.3@1534.88,1662.44
  Bottom Layer w10: P1.5 1000.12,129.64 932.28,129.64 911.28,150.64 911.28,304.39 1002.12,395.23 1052.28,395.23 1090.28,433.23 1090.28,682.23 1348.28,940.23 1348.28,1372.23 1326.28,1394.23 1225.28,1394.23 1203.67,1415.84 1203.67,1731.23 R5.2
VOUTA: P4.1 U5.14 | length 719.9
  Bottom Layer w10: U5.14 2534.81,1212.44 2574.81,1172.44 2681.81,1172.44 2706.81,1147.44 2706.81,924.37 ; P4.1 2706.81,924.37 ; v1(2736.22,866.14) 2736.22,894.96 2706.81,924.37
VOUTB: P4.2 U5.10 | length 367.3
  Top Layer w10: U5.10 2515.67,812.44 2565.67,762.44 P4.2 v1(2741.5,762.44)
pads on no net: P1.1 P1.6 U1.5 U1.14 U1.20 U1.21 U1.22 U1.23 U1.24 U1.25 U1.26 U1.27 U1.28 U2.6 U2.8 U2.11 U3.10 U3.11 U4.1 U4.3 U4.4 U4.5 U4.6 U4.7 U4.8 U5.2 U5.6 U5.7 U6.6 U6.11

## Polygon pours and split planes (outlines as drawn)
P5VGND-MOTOR on Top Layer "Bottom Layer-No Net" (solid, pour order 10): 2140,1350 2790,1350 2790,300 2530,40 2100,40 2100,400 1970,530 1970,1180
P5VGND on Top Layer "Bottom Layer-No Net" (solid, pour order 4): 273.62,2381.89 2561.02,2381.89 2790,2152.91 2790,1390 2780,1380 2120,1380 1940,1200 1940,510 2070,380 2070,39.37 324.8,39.37 49.88,314.29 49.88,2158.15
P5VGND-MOTOR on Bottom Layer "Bottom Layer-No Net" (solid, pour order 8): 1970,1180 2140,1350 2790,1350 2790,300 2529.37,39.37 2100,39.37 2100,400 1970,530
P5VGND on Bottom Layer "Bottom Layer-No Net" (solid, pour order 6): 49.21,2157.48 273.62,2381.89 2561.02,2381.89 2790,2152.91 2790,1380 2120,1380 1940,1200 1940,508.11 1979.88,468.23 2070,378.11 2070,39.37 323.74,39.37 49.21,313.9

## Keep-outs
Keep-Out Layer:
  lines w10: 1955,520 2085,390 2085,20 2535,20 2810,295 2810,1365 2130,1365 1955,1190 1955,520

## Silkscreen, mask and mechanical layers (free items; w line width, h text height)
Top Overlay:
  text "ADC" at 2210,2300 h60
  text "OR" at 453,2286 h60
  text "GROUP" at 2492,2136 h60
  text "POT" at 998.03,2059.06 h60
  text "A3" at 2496,2047 h60
  text "DAC" at 2230,1310 h60
  text "XOR" at 549,1305 h60
  text "A" at 2534.88,838.23 h60
  text "B" at 2534.88,733.23 h60
  text "VOUT" at 2559.06,639.76 h60
  text "5 0" at 1263.78,187.01 h60
  text "DACPWR" at 2202.76,66.93 h60
  text "PWR/F" at 1509.84,61.02 h60
  text "BLUETOOTH" at 639.88,53.23 h60
  text "ENC" at 279.53,51.18 h60
Mechanical 1:
  lines w10: 0,0 0,2440.94 2834.65,2440.94 2834.65,118.11 2834.65,0 0,0 ; 0,0 0,0
Mechanical 16:
  drawing of 1872 lines, arcs and shapes, not listed
  text "1" at -365.6,5335 h70
  text "2" at 2494.4,5335 h70
  text "3" at 5374.4,5335 h70
  text "A" at -1717.6,4429 h70
  text "B" at -1717.6,2537 h70
  text "C" at -1717.6,627 h70
  text "C" at 9582.4,627 h70
  text "ENGINEER:" at 5057.4,-830 h45
  text "TITLE:" at 6557.4,-830 h45
  text "PCB DESIGNER:" at 5057.4,-1125 h45
  text "D" at 9582.4,-1263 h70
  text "DATE:" at 5057.4,-1430 h45
  text "PART NO.:" at 6557.4,-1430 h45
  text "REV:" at 8657.4,-1430 h45
  text "Altium Limited" at 3757.4,-1530 h70
  text ".PRINT_DATE" at 5107.4,-1550 h70
  text "12a Rodborough Rd" at 3757.4,-1630 h70
  text "Frenchs Forest" at 3757.4,-1730 h70
  text "FILE NAME:" at 5057.4,-1730 h45
  text "DWG NO:" at 6557.4,-1730 h45
  text "SCALE:" at 8657.4,-1730 h45
  text "NSW 2086" at 3757.4,-1830 h70
  text ".PCB_FILE_NAME_NO_PATH" at 5107.4,-1850 h70
  text "2" at 2494.4,-2065 h70
  text "3" at 5374.4,-2065 h70
  text "4" at 8244.4,-2065 h70